# EAGLE board y (EAGLE 7.1.0)
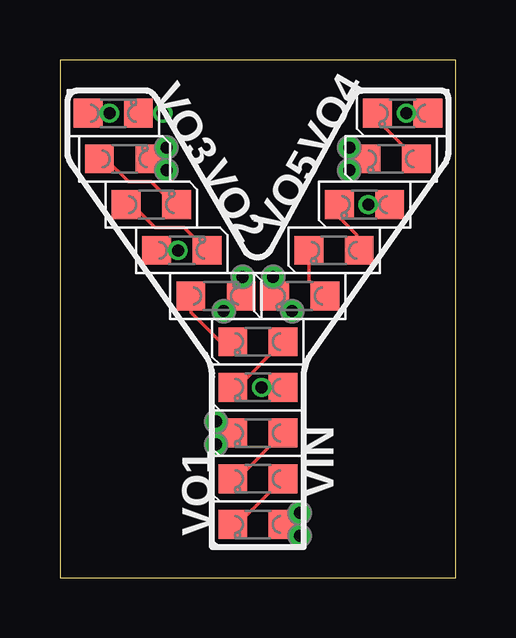
[diagram p0: board, top side]
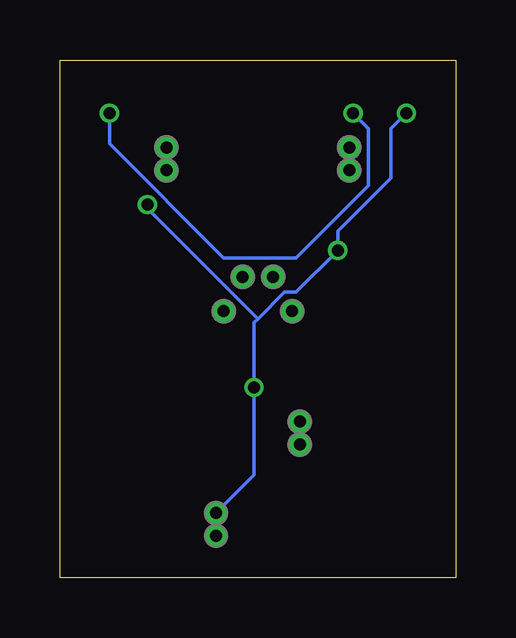
[diagram p1: board, bottom side, seen from below]

Size 16.51 x 21.59 mm. Coordinates in mm from the lower left corner, seen from the top.
Outline: 0,0 16.51,0 16.51,21.59 0,21.59 0,0
Copper layers (1*16): Top 0.035mm / dielectric 1.5mm / Bottom 0.035mm
Design rules "Fusion_eagle_rule_v1.1_tms *": minimum track width 6mil, minimum drill 12mil, track to track 6mil, track to pad 6mil, pad to pad 6mil, via to via 6mil, smd to smd 0mil, copper to edge 10mil, drill to drill 10mil, minimum pad ring 10mil, minimum via ring 6mil, stop-mask expansion 2mil, vias tented up to drill 100mil, thermal gap 10mil

## Footprints (pad centres in the part's own frame; a part is rotated, then mirrored left to right if it is on the bottom)
LED_0805 = smd 1.2 x 1.2: A 0,-1.05; C 0,1.05
P1-20 = drill 0.5: TP 0,0

## Placement (x,y rotation side)
LED1  [LED_0805]  8.26,2.22 90 top
LED2  [LED_0805]  8.26,4.13 90 top
LED3  [LED_0805]  8.26,6.03 90 top
LED4  [LED_0805]  8.26,7.94 90 top
LED5  [LED_0805]  8.26,9.84 90 top
LED6  [LED_0805]  6.51,11.75 270 top
LED7  [LED_0805]  5.08,13.65 270 top
LED8  [LED_0805]  3.81,15.56 270 top
LED9  [LED_0805]  2.7,17.46 270 top
LED10  [LED_0805]  2.22,19.37 270 top
LED11  [LED_0805]  14.29,19.37 90 top
LED12  [LED_0805]  13.81,17.46 90 top
LED13  [LED_0805]  12.7,15.56 90 top
LED14  [LED_0805]  11.43,13.65 90 top
LED15  [LED_0805]  10,11.75 90 top
VIN  [P1-20]  10,1.75 0 top
VIN1  [P1-20]  10,2.7 0 top
VO1  [P1-20]  6.51,6.51 0 top
VO2  [P1-20]  7.62,12.54 0 top
VO3  [P1-20]  4.45,16.99 0 top
VO4  [P1-20]  12.06,17.94 0 top
VO5  [P1-20]  9.68,11.11 0 top
VO6  [P1-20]  6.51,5.56 0 top
VO7  [P1-20]  6.83,11.11 0 top
VO8  [P1-20]  4.45,17.94 0 top
VO9  [P1-20]  12.06,16.99 0 top
VO10  [P1-20]  8.89,12.54 0 top

## Library data of the parts
LED1-LED15 VIN VIN1 VO1-VO10 = CyberRailGuru

## Nets
N$3: LED2.C LED3.A
N$4: LED1.C LED2.A
N$7: LED5.C LED6.A
N$8: LED4.C LED5.A
N$11: LED8.C LED9.A
N$12: LED7.C LED8.A
N$15: LED11.C LED12.A
N$16: LED10.C LED11.A
N$19: LED14.C LED15.A
N$20: LED13.C LED14.A
VIN: LED1.A LED4.A LED7.A LED10.A LED13.A VIN1.TP VIN.TP
VOUT1: LED3.C VO1.TP VO6.TP
VOUT2: LED6.C VO2.TP VO7.TP
VOUT3: LED9.C VO3.TP VO8.TP
VOUT4: LED12.C VO4.TP VO9.TP
VOUT5: LED15.C VO5.TP VO10.TP

## Tracks (layer width: path | path; a pad name or v marks a point on that pad's centre or on a via)
N$3
  Top 0.152: LED2.C 7.4,4.13 LED3.A
N$4
  Top 0.152: LED1.C 7.4,2.22 LED2.A
N$7
  Top 0.152: LED6.A 5.46,11.05 6.67,9.84 LED5.C
N$8
  Top 0.152: LED4.C 7.4,7.94 LED5.A
N$11
  Top 0.152: LED9.A 1.91,17.46 2.86,16.51 3.81,16.51 4.45,15.88 4.54,15.88 LED8.C
N$12
  Top 0.152: LED8.A 3.02,15.56 3.97,14.61 5.18,14.61 LED7.C
N$15
  Top 0.152: LED11.C 13.24,19.09 LED12.A
N$16  (via drill 0.5)
  Top 0.152: LED11.A v14.45,19.37 | v4.29,19.37 LED10.C
  Bottom 0.152: v14.45,19.37 14.45,18.1 9.68,13.34 6.67,13.34 3.65,16.35 3.65,18.73 v4.29,19.37
N$19
  Top 0.152: LED14.C 10.38,12.42 LED15.A
N$20
  Top 0.152: LED13.C 11.65,15.02 12.38,14.29 12.38,13.75 LED14.A
VIN  (via drill 0.5)
  Top 0.152: VIN1.TP 9.78,2.7 LED1.A 9.78,1.75 VIN.TP | LED4.A v8.41,7.94 | LED7.A v4.92,13.65 | LED10.A v2.06,19.37 | LED13.A v12.86,15.56
  Bottom 0.152: VIN1.TP 8.41,4.29 v8.41,7.94 8.41,10.64 8.26,10.79 | 8.26,10.79 7.14,11.91 6.67,11.91 v4.92,13.65 4.92,14.45 2.7,16.67 2.7,18.73 v2.06,19.37 | v12.86,15.56 12.86,15.4 8.26,10.79
VOUT1
  Top 0.152: VO1.TP 6.73,6.51 LED3.C 6.73,5.56 VO6.TP
VOUT2
  Top 0.152: VO2.TP 7.62,11.81 LED6.C 6.92,11.11 VO7.TP
VOUT3
  Top 0.152: VO3.TP 4.22,16.99 LED9.C 4.22,17.94 VO8.TP
VOUT4
  Top 0.152: VO4.TP 12.29,17.94 LED12.C 12.29,16.99 VO9.TP
VOUT5
  Top 0.152: VO10.TP 8.89,11.81 LED15.C 9.59,11.11 VO5.TP

## Text on the board
201bmp: Y